# Altium PCB PCB.PcbDoc
Units mm, origin at the board's own origin, x right, y up, seen from the top; angles counter-clockwise.
Board outline 125 x 74 mm, 2 copper layers (Top Layer, Bottom Layer); 4 components, 0 nets, 80 pads, 0 vias.
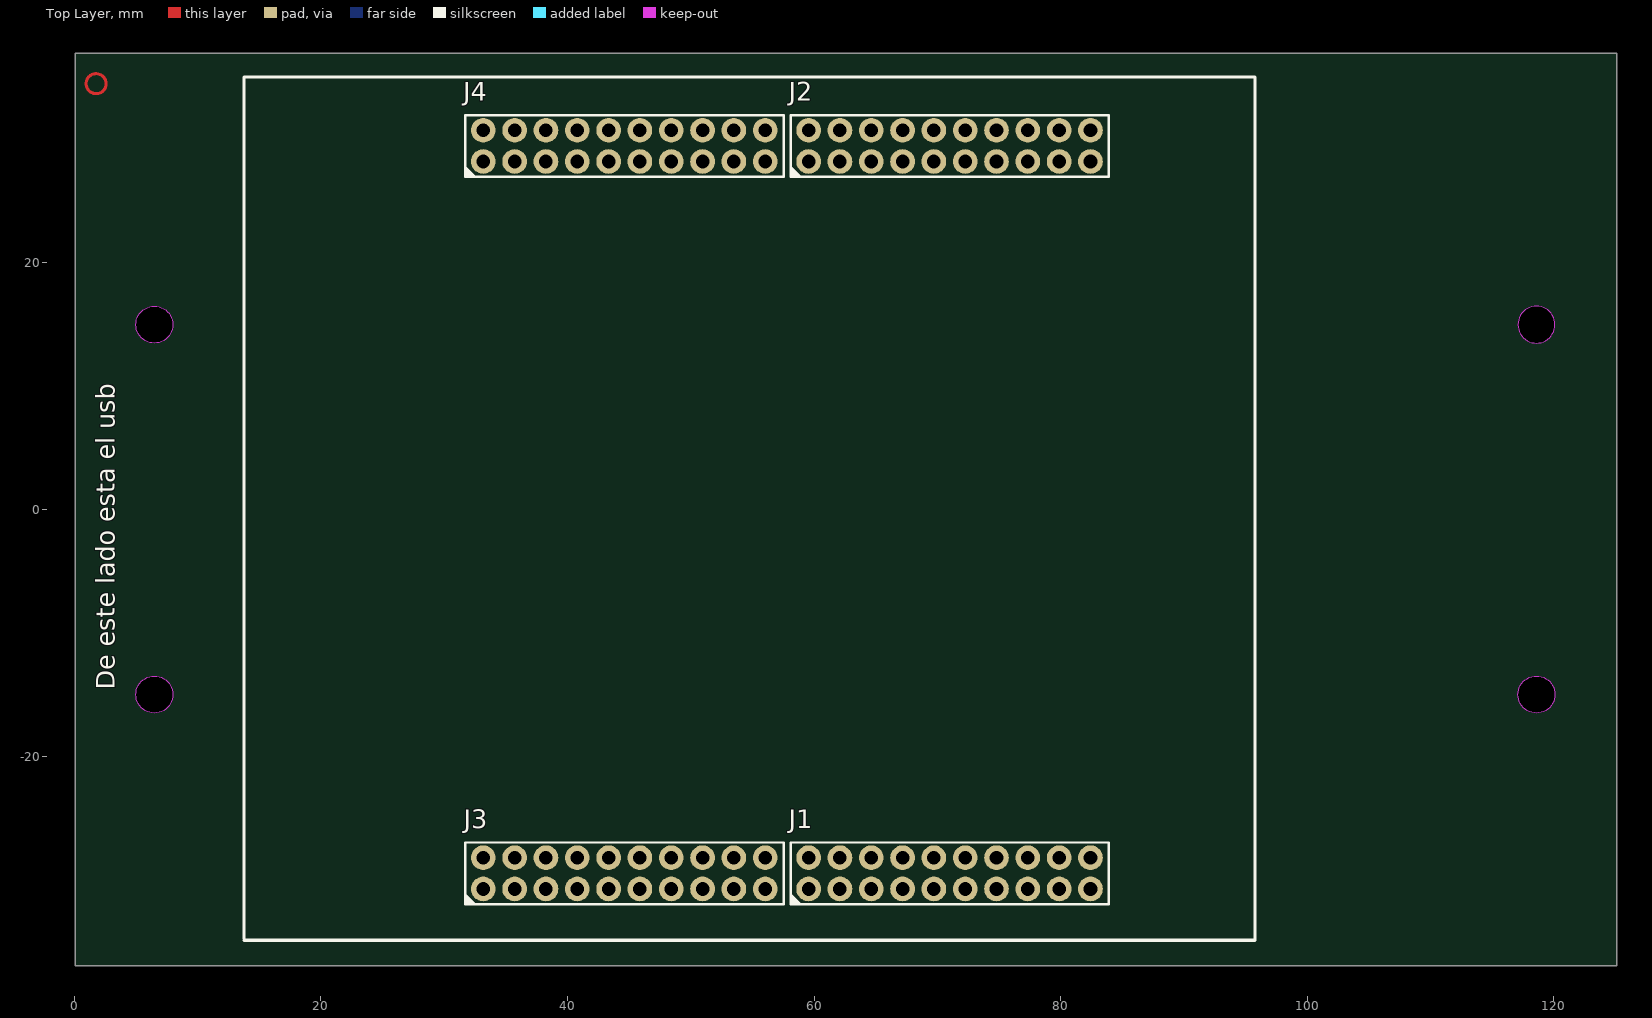
[diagram p0: Top Layer view]
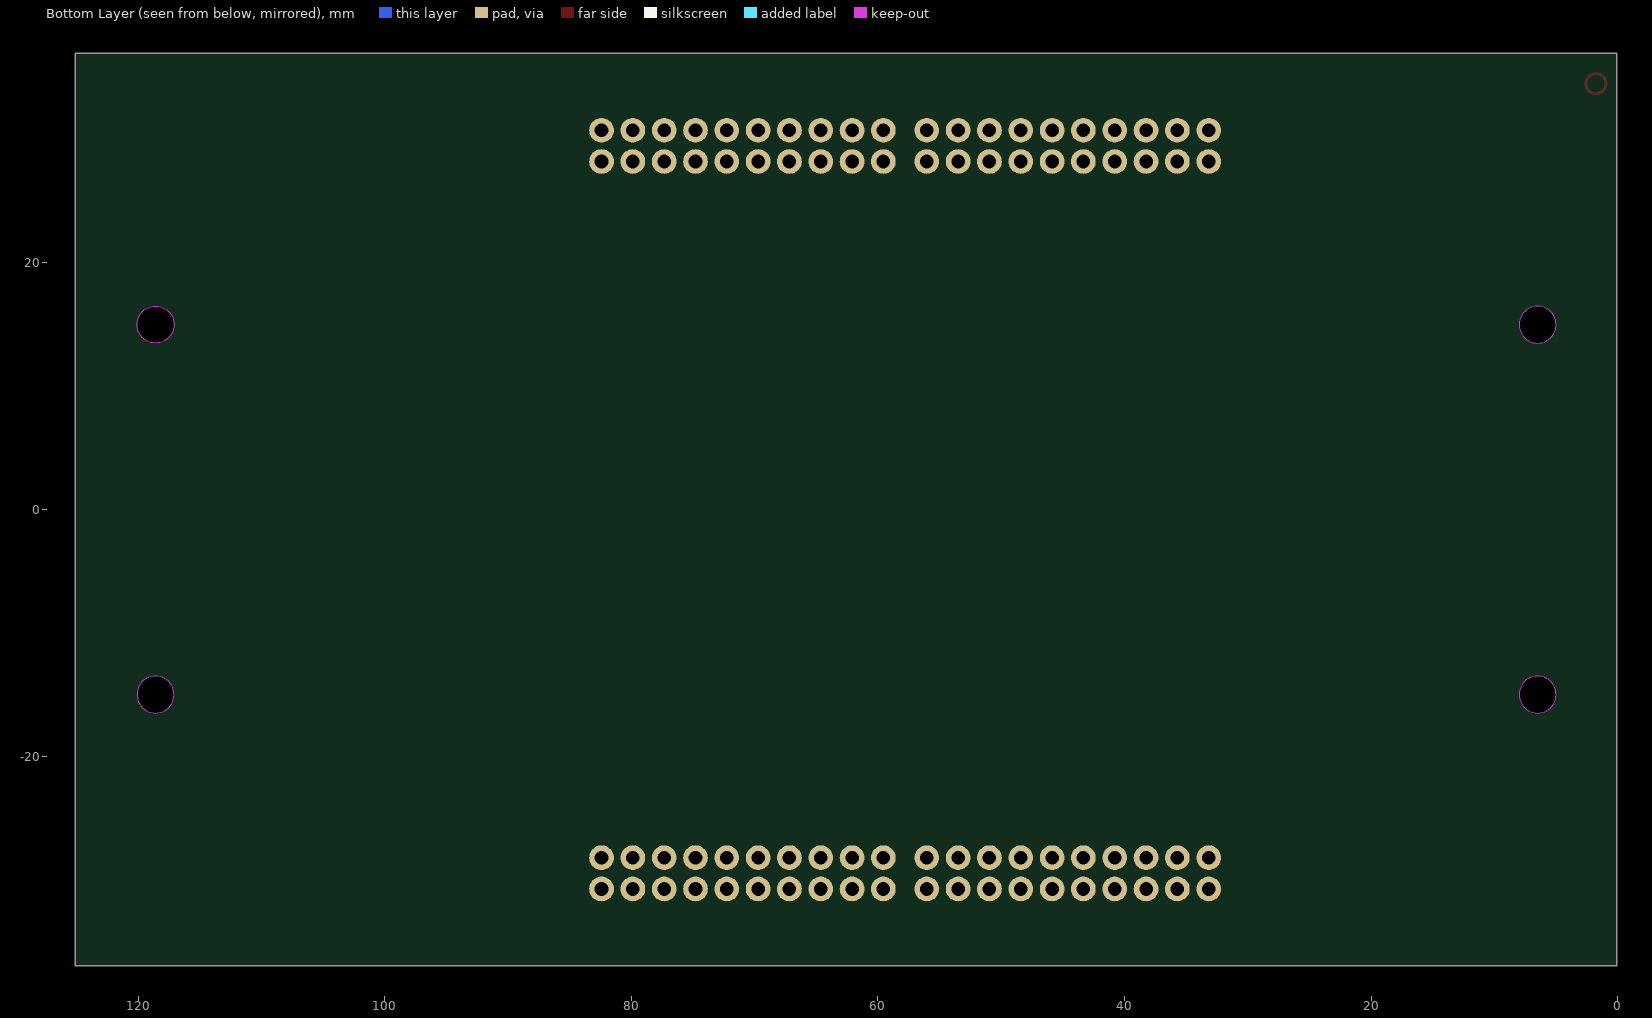
[diagram p1: Bottom Layer view, seen from below]

## Layer stack, top to bottom
Top Solder: solder mask 0.0102, Solder Resist, Dk 3.5
Top Layer: signal copper 0.0356
Dielectric 1: dielectric 0.32, FR-4, Dk 4.8
Bottom Layer: signal copper 0.0356
Bottom Solder: solder mask 0.0102, Solder Resist, Dk 3.5

## Board outline
0.095,-37 0.095,37 125.095,37 125.095,-37
cut-out: 6.5,-16.5 cw(c6.5,-15) 5,-15 cw(c6.5,-15) 6.5,-13.5 cw(c6.5,-15) 8,-15 cw(c6.5,-15)
cut-out: 117.095,15 ccw(c118.595,15) 118.595,13.5 ccw(c118.595,15) 120.095,15 ccw(c118.595,15) 118.595,16.5 ccw(c118.595,15)
cut-out: 117.095,-15 cw(c118.595,-15) 118.595,-13.5 cw(c118.595,-15) 120.095,-15 cw(c118.595,-15) 118.595,-16.5 cw(c118.595,-15)
cut-out: 6.5,13.5 cw(c6.5,15) 5,15 cw(c6.5,15) 6.5,16.5 cw(c6.5,15) 8,15 cw(c6.5,15)

## Design rules (kind name [scope] priority, off if disabled: settings)
Clearance [All] p1: gap=0.254 ignorepadtopadclearanceinfootprint=FALSE except(0: Arc-Hole Track-Hole SMDPad-Hole THPad-Hole Via-Hole Fill-Hole Poly-Hole Region-Hole Text-Hole)
PolygonConnect [All] p1: connectstyle=Relief reliefconductorwidth=0.254 reliefentries=4 polygonreliefangle="90 Angle" airgapwidth=0.254
RoutingVias [All] p1: holewidth=0.711 width=1.27 viastyle="Through Hole" minholewidth=0.711 minwidth=1.27 maxholewidth=0.711 maxwidth=1.27
SolderMaskExpansion [All] p1: expansion=0.102
Width [All] p1: maxlimit=0.254 minlimit=0.254 preferedwidth=0.254
30 further rules are at their usual default settings.

## Components (designator, comment, footprint, x,y, rotation, side; value= is the part's Value field where it differs from the comment)
J1 "M20-7831042" "HARWIN M20-7831045" 70.993,-29.5 r90 top
J2 "M20-7831042" "HARWIN M20-7831045" 70.993,29.5 r90 top
J3 "M20-7831042" "HARWIN M20-7831045" 44.611,-29.5 r90 top
J4 "M20-7831042" "HARWIN M20-7831045" 44.611,29.5 r90 top

## Footprints (in the part's own frame and the unit in brackets; to place one, negate y for a bottom-side part, rotate by r counter-clockwise, add the part's x,y. Pads: shape width x height; smd on the part's side, far side on the other; paste and mask are expansions set on the pad)
"HARWIN M20-7831045" [mm] "2.54mm DIL PC TAIL PIN HEADER ASSEMBLY"
  round 2 hole 1.1: 1(-1.27,11.43) 2(-1.27,8.89) 3(-1.27,6.35) 4(-1.27,3.81) 5(-1.27,1.27) 6(-1.27,-1.27) 7(-1.27,-3.81) 8(-1.27,-6.35) 9(-1.27,-8.89) 10(-1.27,-11.43) 11(1.27,-11.43) 12(1.27,-8.89) 13(1.27,-6.35) 14(1.27,-3.81) 15(1.27,-1.27) 16(1.27,1.27) 17(1.27,3.81) 18(1.27,6.35) 19(1.27,8.89) 20(1.27,11.43)
  silkscreen extent -2.5,-12.93 2.5,12.89, body extent -2.52,-12.9 2.52,12.9, height 8.5

## Part data
J1 J2 J3 J4: "CONN RCPT 20POS 0.1 GOLD PCB", Current Rating (Amps)=3A, Insulation Color=Black, Manufacturer="Harwin Inc.", Material Flammability Rating="UL94 V-0", Operating Temperature="-40°C ~ 105°C", Supplier Part Number 1=952-1836-ND, ComponentLink1Description=Datasheet, ComponentLink1URL=https://cdn.harwin.com/pdfs/C001XX_M20_Series_Connectors.pdf, ComponentLink2Description="DigiKey Link", ComponentLink2URL=https://www.digikey.com/en/products/detail/harwin-inc/M20-7831042/3727803, Connector Type=Receptacle, Contact Finish - Mating=Gold, Contact Finish - Post=Tin, Contact Finish Thickness - Mating=Flash, Contact Length - Post="0.118\" (3.00mm)", Contact Type="Female Socket", Fastening Type=Push-Pull, Insulation Height="0.335\" (8.51mm)", LastUpdated="21/9/2022 19:11:50", Lifecycle Status=Active, Mated Stacking Heights="11.04mm, 12.63mm", Minimum Order=1, Mounting Type="Through Hole", Number of Positions=20, Number of Positions Loaded=All, Number of Rows=2, Packaging=Tube, Part Number=M20-7831042, Part Status=Active, Pitch - Mating="0.100\" (2.54mm)", Price=1.47, Row Spacing - Mating="0.100\" (2.54mm)", Series=M20, Style="Board to Board or Cable", Supplier 1=DigiKey, Termination=Solder

## Nets (pads, with @x,y where several pads share a name; then routed paths per layer and width w, separated by ;. In a path a pad name is that pad's centre, name@x,y a point inside that pad or via, vN(x,y) a via of type N, cw(c..) or ccw(c..) an arc to the next point about the centre after c; other vN are vias at no path point)
pads on no net: J1.1 J1.2 J1.3 J1.4 J1.5 J1.6 J1.7 J1.8 J1.9 J1.10 J1.11 J1.12 J1.13 J1.14 J1.15 J1.16 J1.17 J1.18 J1.19 J1.20 J2.1 J2.2 J2.3 J2.4 J2.5 J2.6 J2.7 J2.8 J2.9 J2.10 J2.11 J2.12 J2.13 J2.14 J2.15 J2.16 J2.17 J2.18 J2.19 J2.20 J3.1 J3.2 J3.3 J3.4 J3.5 J3.6 J3.7 J3.8 J3.9 J3.10 J3.11 J3.12 J3.13 J3.14 J3.15 J3.16 J3.17 J3.18 J3.19 J3.20 J4.1 J4.2 J4.3 J4.4 J4.5 J4.6 J4.7 J4.8 J4.9 J4.10 J4.11 J4.12 J4.13 J4.14 J4.15 J4.16 J4.17 J4.18 J4.19 J4.20
copper on no net: | length 5.1
  Top Layer w0.254: 2.591,34.544 ccw(c1.778,34.544) 2.591,34.544

## Other copper
Top Layer:
  pour cut-out: 1.778,33.731 cw(c1.778,34.544) 0.965,34.544 cw(c1.778,34.544) 1.778,35.357 cw(c1.778,34.544) 2.591,34.544 cw(c1.778,34.544)
  pour cut-out: 1.778,33.731 cw(c1.778,34.544) 0.965,34.544 cw(c1.778,34.544) 1.778,35.357 cw(c1.778,34.544) 2.591,34.544 cw(c1.778,34.544)

## Silkscreen, mask and mechanical layers (free items; w line width, h text height)
Top Overlay:
  lines w0.254: 13.758,-34.925 95.758,-34.925 95.758,35.075 13.758,35.075 13.758,-34.798
  text "De este lado esta el usb" at 3.302,-14.605 h1.52 r90
Bottom Solder:
  the board outline again, w0.254
Drill Drawing:
  circle w0.254: c118.595,15 r1.5
  circle w0.254: c6.5,15 r1.5
  circle w0.254: c6.5,-15 r1.5
  circle w0.254: c118.595,-15 r1.5

## Dimensions
31.721,27 to 57.541,27 on Top Overlay
31.721,32 to 31.721,-32 on Top Overlay
83.923,32 to 83.923,27 on Top Overlay